# Altium PCB tinybord_1_1.PcbDoc
Units mm, origin at the board's own origin, x right, y up, seen from the top; angles counter-clockwise.
Board outline 35.56 x 45.72 mm, 2 copper layers (Top Layer, Bottom Layer), stack 0.533 mm thick; 59 components, 54 nets, 273 pads, 164 vias.
Unrouted connection lines stored in the file: 122.
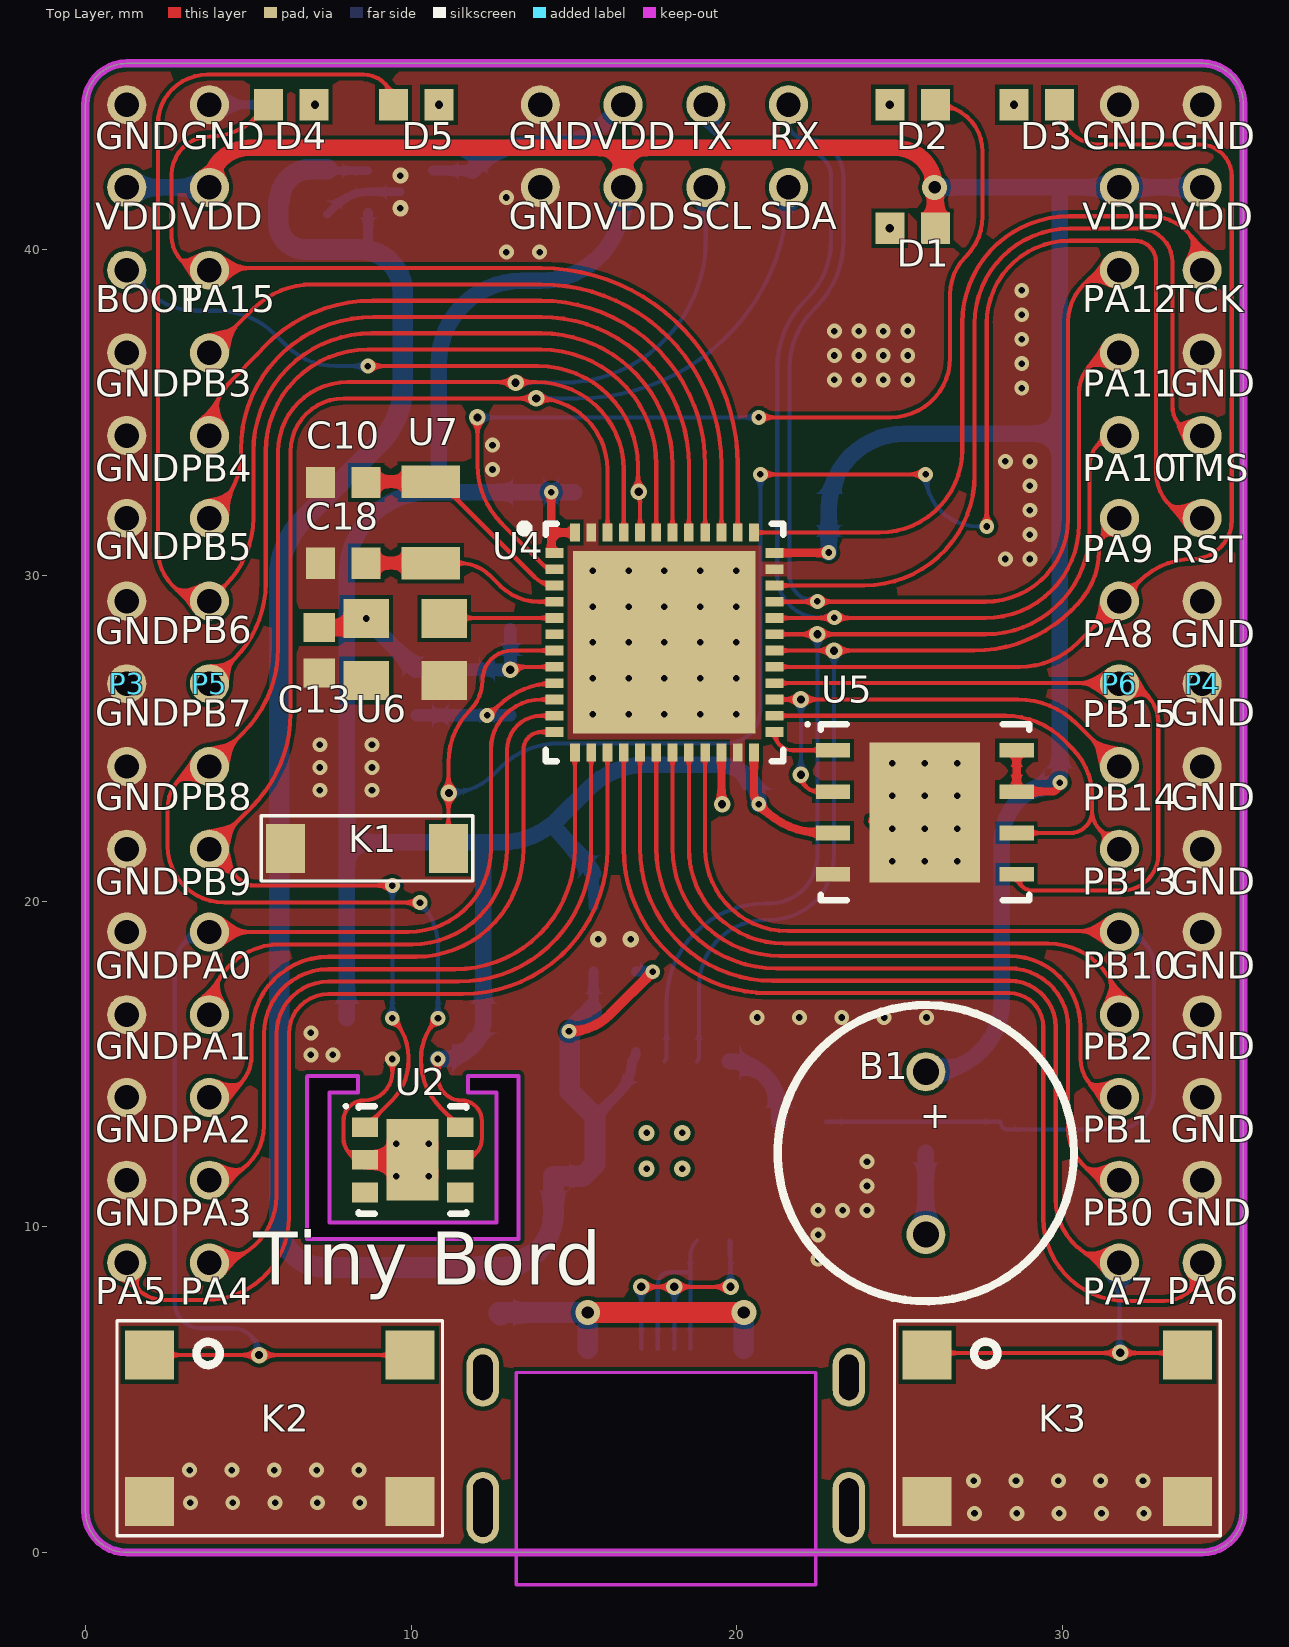
[diagram p0: Top Layer view]
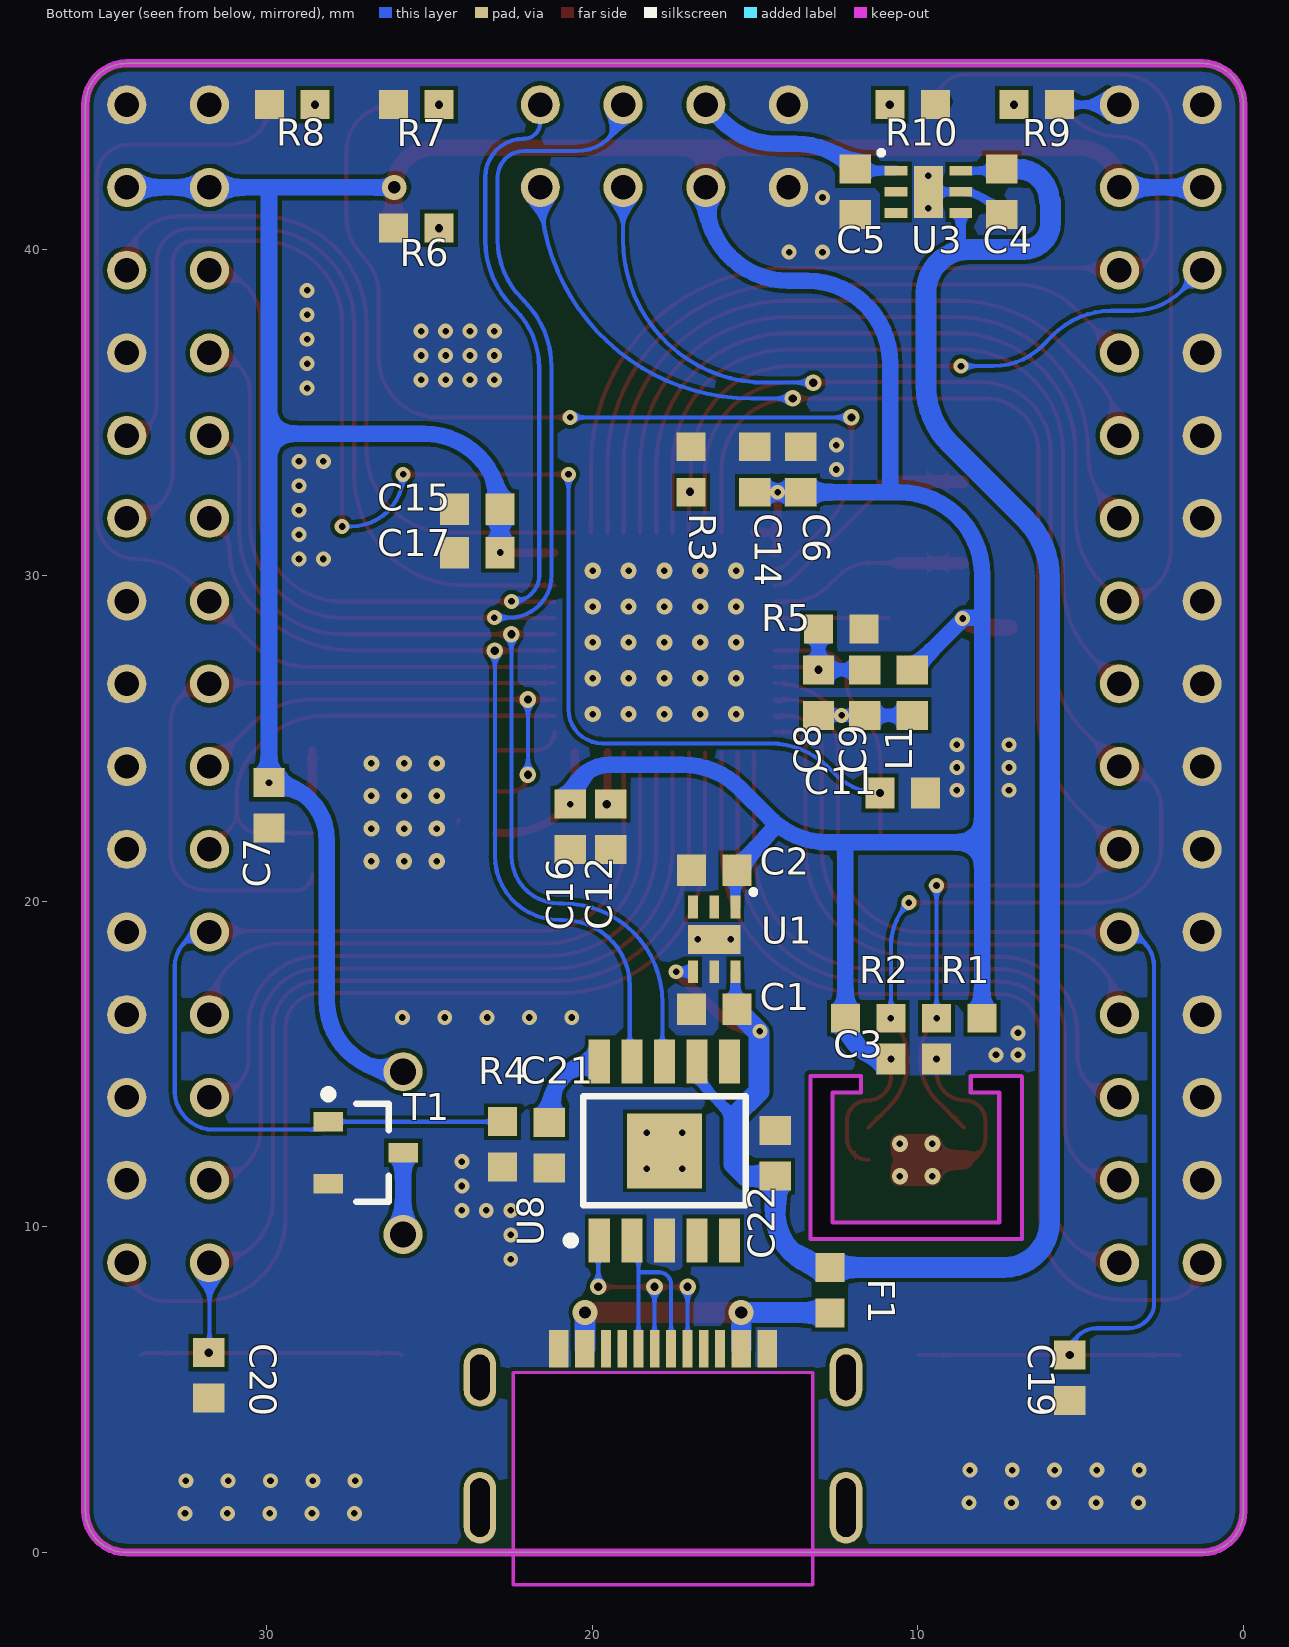
[diagram p1: Bottom Layer view, seen from below]
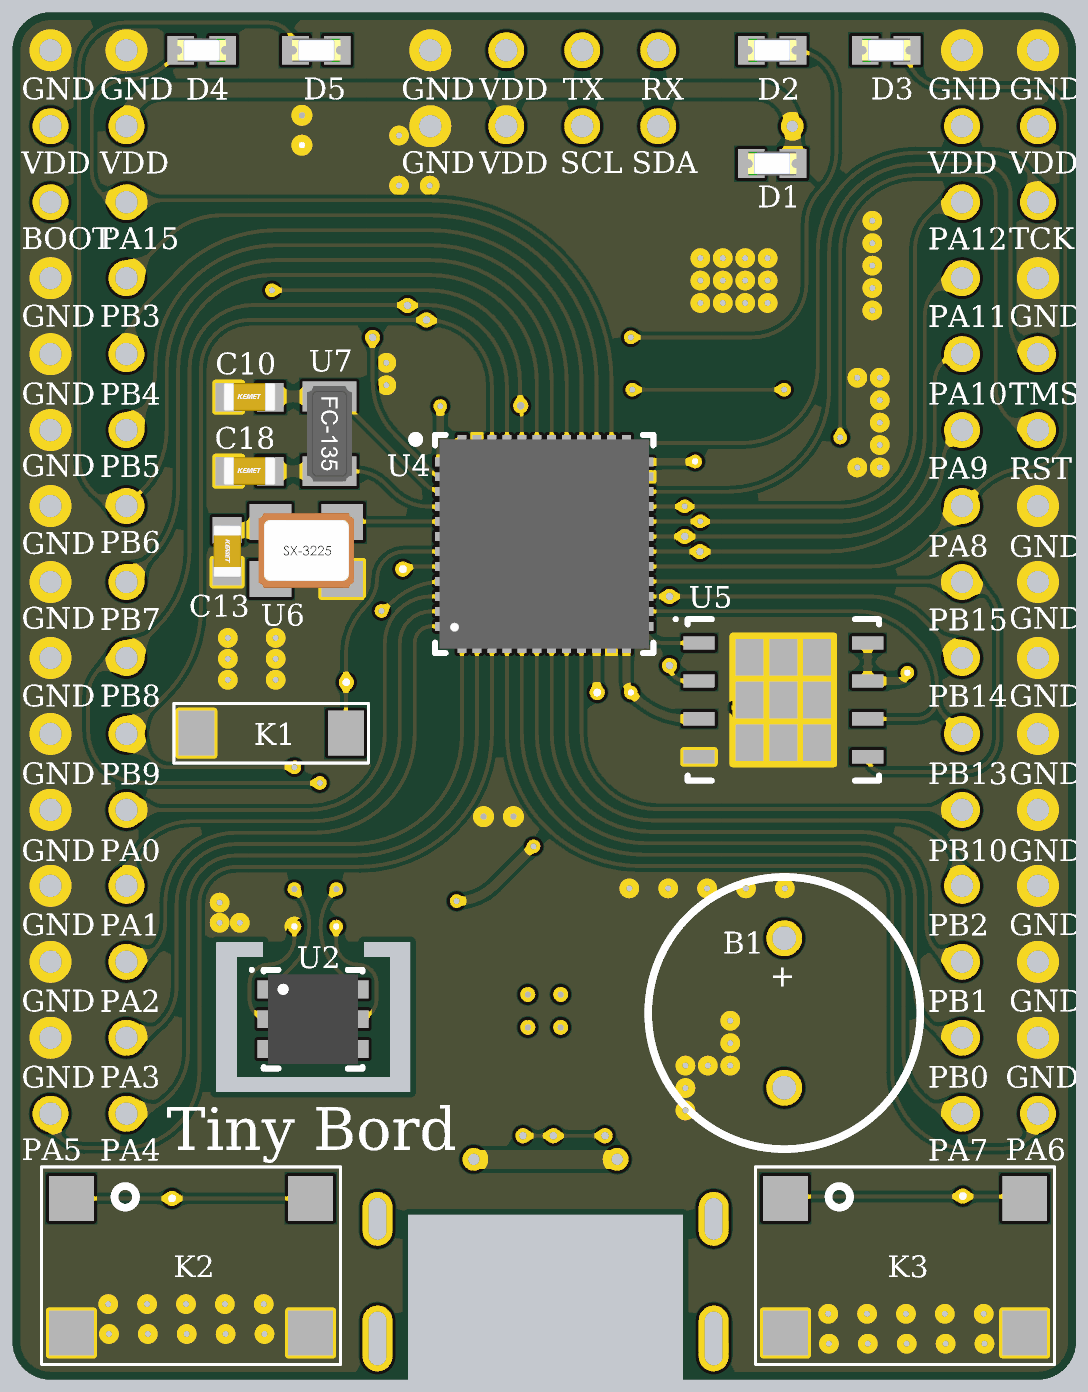
[diagram p2: 3D render of the assembled board from above, using the file's embedded part models]
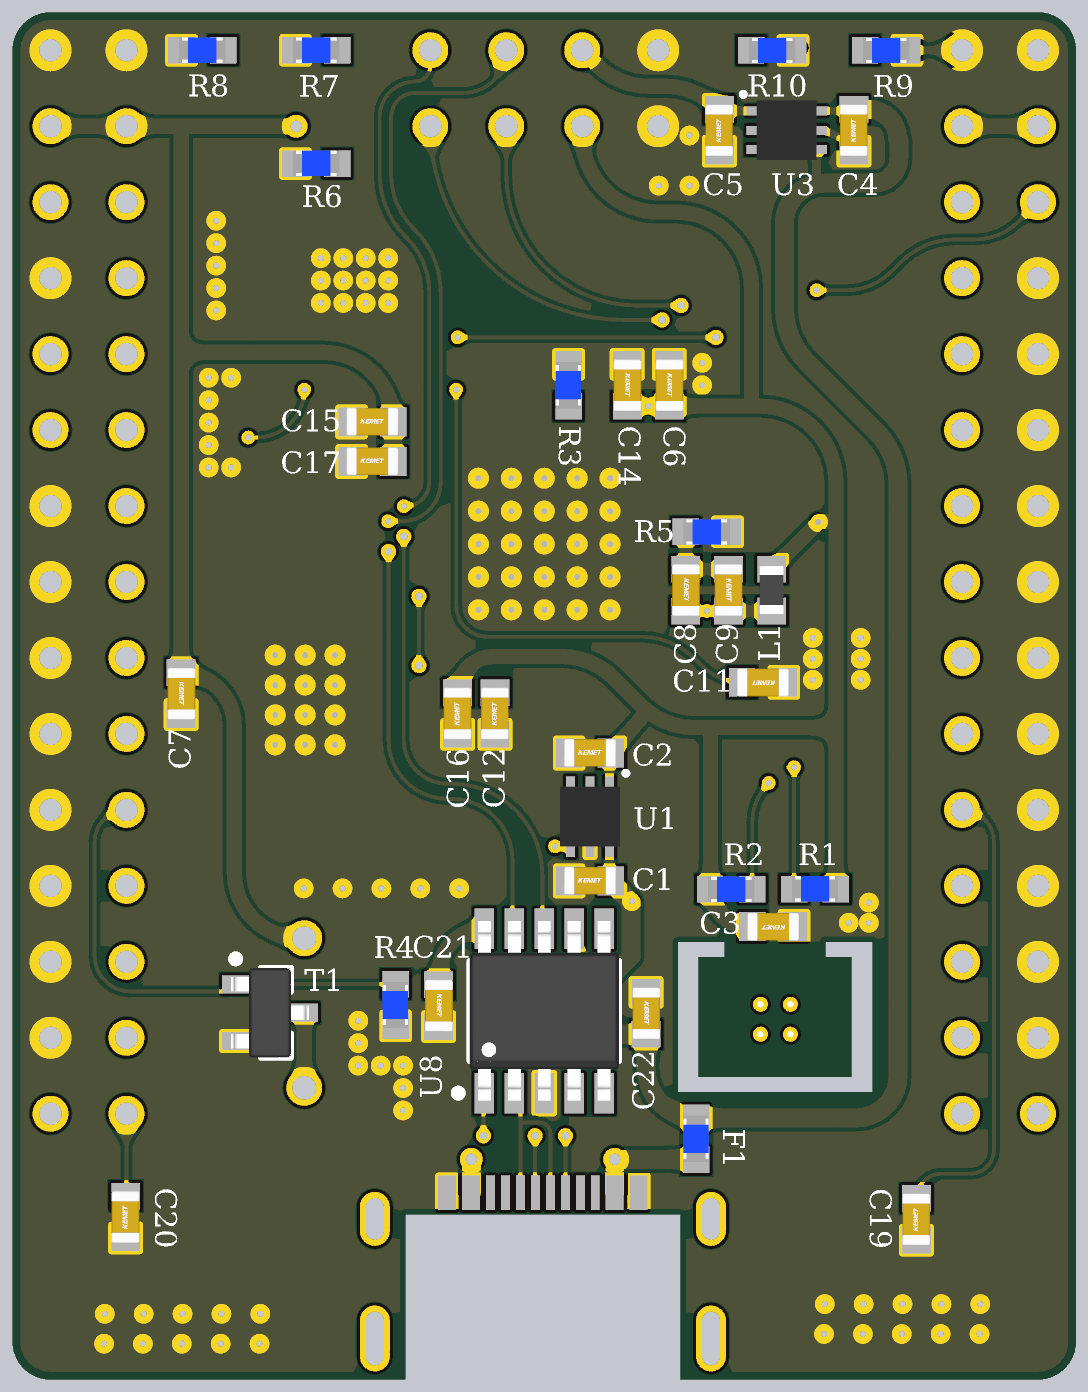
[diagram p3: 3D render of the assembled board from below, using the file's embedded part models]

## Layer stack, top to bottom
Top Solder: solder mask 0.0102, Solder Resist, Dk 3.5
Top Layer: signal copper 0.0356
Dielectric 2: prepreg 0.0711, PP-006, Dk 4.1
Dielectric 1: dielectric 0.32, FR-4, Dk 4.8
Dielectric 3: prepreg 0.0711, PP-006, Dk 4.1
Bottom Layer: signal copper 0.0356
Bottom Solder: solder mask 0.0102, Solder Resist, Dk 3.5

## Board outline
1.27,0 cw(c1.27,1.27) 0,1.27 0,44.45 cw(c1.27,44.45) 1.27,45.72 34.29,45.72 cw(c34.29,44.45) 35.56,44.45 35.56,1.27 cw(c34.29,1.27) 34.29,0
cut-out: 6.8,9.625 6.8,14.6 6.825,14.625 8.375,14.625 8.375,14.125 7.5,14.125 7.5,10.125 12.625,10.125 12.625,14.125 11.75,14.125 11.75,14.625 13.3,14.625 13.3,9.625

## Design rules (kind name [scope] priority, off if disabled: settings)
Clearance Clearance_2 [InNamedPolygon('GND_L01_P000')] p1: gap=0.127 ignorepadtopadclearanceinfootprint=FALSE except(0: Arc-Hole Track-Hole SMDPad-Hole THPad-Hole Via-Hole Fill-Hole Poly-Hole Region-Hole Text-Hole)
Clearance Clearance_1 [InNamedPolygon('Bottom Layer-GND')] p2: gap=0.127 ignorepadtopadclearanceinfootprint=FALSE except(0: Arc-Hole Track-Hole SMDPad-Hole THPad-Hole Via-Hole Fill-Hole Poly-Hole Region-Hole Text-Hole)
Clearance [All] p3: gap=0.127 ignorepadtopadclearanceinfootprint=TRUE except(0: Arc-Text Arc-Hole Track-Text Track-Hole SMDPad-Hole THPad-Hole Via-Hole Fill-Hole Poly-Hole Region-Hole Text-Text Text-Hole; 0.102: Arc-SMDPad Track-SMDPad)
HoleToHoleClearance [All] p1: gap=0.127 allowstackedmicrovias=TRUE
MinimumSolderMaskSliver [All] p1: minsoldermaskwidth=0
PlaneClearance [All] p1: clearance=0.3
PlaneConnect [All] p1: planeconnectstyle=Direct reliefexpansion=0.508 reliefentries=4 reliefconductorwidth=0.254 reliefairgap=0.254
PolygonConnect PolygonConnect_11 [All vs IsNamedPolygon('GND_L01_P000')] p1: connectstyle=Direct reliefconductorwidth=0.254 reliefentries=4 polygonreliefangle="90 Angle" airgapwidth=0.254
PolygonConnect PolygonConnect_10 [All vs IsNamedPolygon('Bottom Layer-GND')] p2: connectstyle=Direct reliefconductorwidth=0.254 reliefentries=4 polygonreliefangle="90 Angle" airgapwidth=0.254
PolygonConnect PolygonConnect_9 [All vs IsNamedPolygon('Bottom Layer-GND')] p3: connectstyle=Direct reliefconductorwidth=0.254 reliefentries=4 polygonreliefangle="90 Angle" airgapwidth=0.254
PolygonConnect PolygonConnect_8 [All vs IsNamedPolygon('GND_L01_P000')] p4: connectstyle=Direct reliefconductorwidth=0.254 reliefentries=4 polygonreliefangle="90 Angle" airgapwidth=0.254
PolygonConnect PolygonConnect_7 [All vs IsNamedPolygon('Bottom Layer-GND')] p5: connectstyle=Relief reliefconductorwidth=0.254 reliefentries=4 polygonreliefangle="90 Angle" airgapwidth=0.127
PolygonConnect PolygonConnect_6 [All vs IsNamedPolygon('GND_L01_P000')] p6: connectstyle=Relief reliefconductorwidth=0.127 reliefentries=4 polygonreliefangle="90 Angle" airgapwidth=0.127
PolygonConnect PolygonConnect_5 [All vs IsNamedPolygon('GND_L01_P000')] p7: connectstyle=Relief reliefconductorwidth=0.254 reliefentries=4 polygonreliefangle="90 Angle" airgapwidth=0.127
PolygonConnect PolygonConnect_4 [All vs IsNamedPolygon('Bottom Layer-GND')] p8: connectstyle=Relief reliefconductorwidth=0.254 reliefentries=4 polygonreliefangle="90 Angle" airgapwidth=0.127
PolygonConnect PolygonConnect_3 [All vs IsNamedPolygon('Bottom Layer-GND')] p9: thpad.connectstyle=Relief thpad.reliefconductorwidth=0.254 thpad.reliefentries=4 thpad.polygonreliefangle="90 Angle" thpad.airgapwidth=0.127 smdpad.connectstyle=Relief smdpad.reliefconductorwidth=0.254 smdpad.reliefentries=4 smdpad.polygonreliefangle="90 Angle" smdpad.airgapwidth=0.254 via.connectstyle=Relief via.reliefconductorwidth=0.254 via.reliefentries=4 via.polygonreliefangle="90 Angle" via.airgapwidth=0.254
PolygonConnect PolygonConnect_2 [All vs IsNamedPolygon('Bottom Layer-GND')] p10: thpad.connectstyle=Relief thpad.reliefconductorwidth=0.254 thpad.reliefentries=4 thpad.polygonreliefangle="90 Angle" thpad.airgapwidth=0.127 smdpad.connectstyle=Relief smdpad.reliefconductorwidth=0.254 smdpad.reliefentries=4 smdpad.polygonreliefangle="90 Angle" smdpad.airgapwidth=0.127 via.connectstyle=Relief via.reliefconductorwidth=0.254 via.reliefentries=4 via.polygonreliefangle="90 Angle" via.airgapwidth=0.254
PolygonConnect PolygonConnect_1 [All vs IsNamedPolygon('Bottom Layer-GND')] p11: thpad.connectstyle=Relief thpad.reliefconductorwidth=0.254 thpad.reliefentries=4 thpad.polygonreliefangle="90 Angle" thpad.airgapwidth=0.127 smdpad.connectstyle=Relief smdpad.reliefconductorwidth=0.254 smdpad.reliefentries=4 smdpad.polygonreliefangle="90 Angle" smdpad.airgapwidth=0.254 via.connectstyle=Relief via.reliefconductorwidth=0.254 via.reliefentries=4 via.polygonreliefangle="90 Angle" via.airgapwidth=0.254
PolygonConnect [All] p12: connectstyle=Relief reliefconductorwidth=0.254 reliefentries=4 polygonreliefangle="90 Angle" airgapwidth=0.254
RoutingVias [All] p1: holewidth=0.711 width=1.27 viastyle="Through Hole" minholewidth=0.203 minwidth=0.457 maxholewidth=0.711 maxwidth=1.27
ShortCircuit [All] p1: allowed=TRUE
SilkToSilkClearance [All] p1: silktosilkclearance=0
SilkToSolderMaskClearance [IsPad] p1: minsilkscreentomaskgap=0 clearancetoexposedcopper=TRUE
SolderMaskExpansion [All] p1: expansion=0.102
Width [All] p1: maxlimit=1.27 minlimit=0.127 preferedwidth=0.203 minimp=50.000000 maximp=50.000000 favimp=50.000000
23 further rules are at their usual default settings.

## Classes and differential pairs
component class tinybord: B1 C1 C2 C3 C4 C5 C6 C7 C8 C9 C10 C11 C12 C13 C14 C15 C16 C17 C18 C19 C20 C21 C22 D1 D2 D3 D4 D5 F1 K1 K2 K3 L1 R1 R2 R3 R4 R5 R6 R7 R8 R9 R10 T1 U1 U2 U3 U4 U5 U6 U7 U8

## Components (designator, comment, footprint, x,y, rotation, side; value= is the part's Value field where it differs from the comment)
B1 "BEEP" BEEP0905 25.806,12.257 r270 top
C1 "C0603" C0603 16.25,16.675 r180 bottom value=1uF/6.3v
C2 "C0603" C0603 16.25,20.95 r180 bottom value=1uF/6.3v
C3 "C0603" C0603 10.125,15.15 r0 bottom value=100nF
C4 "C0603" C0603 7.425,41.775 r90 bottom value=1uF/6.3v
C5 "C0603" C0603 11.925,41.775 r90 bottom value=1uF/6.3v
C6 "C0603" C0603 13.6,33.25 r270 bottom value=100nF
C7 "C0603" C0603 29.921,22.936 r270 bottom value=100nF
C8 "C0603" C0603 13.05,26.4 r270 bottom value=1uF
C9 "C0603" C0603 11.625,26.4 r270 bottom value=100nF
C10 "C0603" C0603 7.925,32.85 r0 top value=7pF
C11 "C0603" C0603 10.465,23.317 r0 bottom value=100nF
C12 "C0603" C0603 19.425,22.275 r90 bottom value=4.7uF
C13 "C0603" C0603 7.175,27.7 r270 top value=100nF
C14 "C0603" C0603 15.007,33.25 r270 bottom value=100nF
C15 "C0603" C0603 23.525,32.025 r180 bottom value=100nF
C16 "C0603" C0603 20.675,22.275 r90 bottom value=100nF
C17 "C0603" C0603 23.525,30.7 r180 bottom value=10uF
C18 "C0603" C0603 7.925,30.375 r0 top value=7pF
C19 "C0603" C0603 5.334,5.359 r90 bottom value=10nF
C20 "C0603" C0603 31.775,5.436 r90 bottom value=10nF
C21 "C0603" C0603 21.311,12.506 r270 bottom value=100nF
C22 "C0603" C0603 14.375,12.25 r270 bottom value=100nF
D1 "L0603" led0603 25.4,40.659 r0 top
D2 "L0603" led0603 25.4,44.45 r0 top
D3 "L0603" led0603 29.21,44.45 r0 top
D4 "L0603" led0603 6.325,44.45 r180 top
D5 "L0603" led0603 10.16,44.45 r180 top
F1 "FUSE" R0603 12.7,8.05 r90 bottom
K1 "key_3x4x2" "Key 3x4x2" 6.147,21.615 r0 top
K2 "key_6x6" "Key 6x6" 5.969,3.81 r0 top locked
K3 "key_6x6" "Key 6x6" 29.845,3.81 r0 top locked
L1 "B0603" B0603 10.175,26.4 r270 bottom value=330ohm
P1 "OLED" "4x1 header" 13.97,41.91 r0 top
P2 "wireless" "4x1 header" 13.97,44.45 r0 top
P3 "m15Pin" "15x1 header" 1.27,44.45 r270 top
P4 "m15Pin" "15x1 header" 34.29,44.45 r270 top
P5 "m15Pin" "15x1 header" 3.81,44.45 r270 top
P6 "m15Pin" "15x1 header" 31.75,44.45 r270 top
P7 "USB-Type-c" USB-TYPE-C 17.825,5.675 r180 bottom locked
R1 "R0603" R0603 8.725,16.4 r180 bottom value=10K
R2 "R0603" R0603 11.525,16.4 r0 bottom value=10K
R3 "R0603" R0603 16.967,33.25 r90 bottom value=10K
R4 "R0603" R0603 22.75,12.525 r90 bottom value=10K
R5 "R0603" R0603 12.35,28.35 r0 bottom value=0R
R6 "R0603" R0603 25.4,40.659 r180 bottom value=10K
R7 "R0603" R0603 25.4,44.45 r180 bottom value=1K
R8 "R0603" R0603 29.21,44.45 r180 bottom value=1K
R9 "R0603" R0603 6.35,44.45 r0 bottom value=1K
R10 "R0603" R0603 10.16,44.45 r0 bottom value=1K
T1 "NMOS" NMOS-BSH103 26.949,12.268 r180 bottom
U1 "LP5912" LP5912 16.25,18.825 r270 bottom
U2 "SHT21" SHT21 10.05,12.05 r0 top
U3 "LP5912" LP5912 9.675,41.775 r180 bottom
U4 "STM32F411CE" "STM32F411CE QFN" 17.78,27.94 r0 top
U5 "W25Q128JV_QFN" "W25Q64 QFN" 25.775,22.725 r0 top
U6 "SG-310SCF" SG-310SCF 9.825,27.725 r0 top
U7 "FC-135" FC-135 10.6,31.625 r90 top
U8 "CH9340K" CH9340 17.78,12.328 r90 bottom

## Footprints (in the part's own frame and the unit in brackets; to place one, negate y for a bottom-side part, rotate by r counter-clockwise, add the part's x,y. Pads: shape width x height; smd on the part's side, far side on the other; paste and mask are expansions set on the pad)
"4x1 header" [mm]
  round 1.2 hole 0.75: 1(0,0) 2(2.54,0) 3(5.08,0) 4(7.62,0)
"15x1 header" [mm]
  round 1.2 hole 0.75: 1(0,0) 2(2.54,0) 3(5.08,0) 4(7.62,0) 5(10.16,0) 6(12.7,0) 7(15.24,0) 8(17.78,0) 9(20.32,0) 10(22.86,0) 11(25.4,0) 12(27.94,0) 13(30.48,0) 14(33.02,0) 15(35.56,0)
B0603 [mil]
  rect 35x38 smd: 1(-27.5,0) 2(27.5,0)
  body extent -31,-16 31,16, height 31
BEEP0905 [mm]
  round 1.2 hole 0.8: 1(-2.5,0) 2(2.5,0)
  silkscreen extent -4.55,-4.55 4.55,4.55
C0603 [mil]
  rect 35x38 smd: 1(-27.5,0) 2(27.5,0)
  body extent -34,-18 34,19, height 33
CH9340 [mm]
  rect 1.35x0.65 smd: 1(-2.75,2) 2(-2.75,1) 3(-2.75,0) 4(-2.75,-1) 5(-2.75,-2) 6(2.75,-2) 7(2.75,-1) 8(2.75,0) 9(2.75,1) 10(2.75,2)
  rect 2.3x2.3 smd: 11(0,0)
  silkscreen extent -2.87,-2.5 1.68,3, body extent -3,-2.5 3,2.5, height 1.8
FC-135 [mm]
  rect 1x1.8 smd: 1(-1.25,0) 2(1.25,0)
  body extent -1.6,-0.75 1.6,0.75, height 0.8
"Key 3x4x2" [mm]
  rect 1.2x1.5 smd: 1(0,0) 2(5,0)
  silkscreen extent -0.75,-1 5.75,1
"Key 6x6" [mm]
  rect 1.5x1.5 smd: 1(-4,2.25) 2(4,2.25) 3(-4,-2.25) 4(4,-2.25)
  silkscreen extent -5,-3.3 5,3.3
led0603 [mil]
  rect 35x38 smd: 1(-27.5,0) 2(27.5,0)
  body extent -32,-16 32,16, height 24
LP5912 [mm] "SON, 6-Leads, Body 2.00x2.00mm, Pitch 0.65mm, Thermal Pad 1.60x0.89mm, IPC Medium Density"
  rect 0.7x0.3 smd: 1(-0.995,0.65) 2(-0.995,0) 3(-0.995,-0.65) 4(0.995,-0.65) 5(0.995,0) 6(0.995,0.65)
  rect 0.89x1.6 smd: 7(0,0)
  silkscreen extent -1.5,1.15 -1.4,1.25, body extent -1,-1 1,1, height 0.8
NMOS-BSH103 [mm] "SOT23, 3-Leads, Body 2.90x2.30mm, Pitch 0.95mm, IPC Medium Density"
  rect 0.9x0.6 smd: 1(-1.15,0.95) 2(-1.15,-0.95) 3(1.15,0)
  silkscreen extent -1.28,-1.5 0.7,1.92, body extent -1.3,-1.5 1.3,1.5, height 1.1
R0603 [mil]
  rect 35x35 smd: 1(-27.5,0) 2(27.5,0)
  body extent -31,-16 31,17, height 18
SG-310SCF [mm] "3225"
  rect 1.4x1.2 smd: 1(-1.2,-0.95) 2(1.2,-0.95) 3(1.2,0.95) 4(-1.2,0.95)
  body extent -1.6,-1.25 1.6,1.25, height 0.81
SHT21 [mm] "SON, 6-Leads, Body 3.00x3.00mm, Pitch 1.00mm, Thermal Pad 2.40x1.50mm, IPC Medium Density"
  rect 0.8x0.6 smd: 1(-1.46,1) 2(-1.46,0) 3(-1.46,-1) 4(1.46,-1) 5(1.46,0) 6(1.46,1)
  rect 1.6x2.5 smd paste-0.75: 7(0,0)
  silkscreen extent -2.1,-1.65 1.65,1.7, body extent -1.5,-1.5 1.5,1.5, height 1.1
"STM32F411CE QFN" [mm] "QFN, 48-Leads, Body 7.00x7.00mm, Pitch 0.50mm, Thermal Pad 5.60x5.60mm, IPC Medium Density"
  rect 0.55x0.3 smd: 1(-3.375,2.75) 2(-3.375,2.25) 3(-3.375,1.75) 4(-3.375,1.25) 5(-3.375,0.75) 6(-3.375,0.25) 7(-3.375,-0.25) 8(-3.375,-0.75) 9(-3.375,-1.25) 10(-3.375,-1.75) 11(-3.375,-2.25) 12(-3.375,-2.75) 25(3.375,-2.75) 26(3.375,-2.25) 27(3.375,-1.75) 28(3.375,-1.25) 29(3.375,-0.75) 30(3.375,-0.25) 31(3.375,0.25) 32(3.375,0.75) 33(3.375,1.25) 34(3.375,1.75) 35(3.375,2.25) 36(3.375,2.75)
  rect 0.3x0.55 smd: 13(-2.75,-3.375) 14(-2.25,-3.375) 15(-1.75,-3.375) 16(-1.25,-3.375) 17(-0.75,-3.375) 18(-0.25,-3.375) 19(0.25,-3.375) 20(0.75,-3.375) 21(1.25,-3.375) 22(1.75,-3.375) 23(2.25,-3.375) 24(2.75,-3.375) 37(2.75,3.375) 38(2.25,3.375) 39(1.75,3.375) 40(1.25,3.375) 41(0.75,3.375) 42(0.25,3.375) 43(-0.25,3.375) 44(-0.75,3.375) 45(-1.25,3.375) 46(-1.75,3.375) 47(-2.25,3.375) 48(-2.75,3.375)
  rect 5.6x5.6 smd: 49(0,0)
  silkscreen extent -4.42,-3.65 3.65,3.65, body extent -3.5,-3.5 3.5,3.5, height 0.55
USB-TYPE-C [mm]
  rect 0.6x1.15 smd: 1(-3.2,0.575) 2(-2.4,0.575) 11(2.4,0.575) 12(3.2,0.575)
  rect 0.3x1.15 smd: 3(-1.75,0.575) 4(-1.25,0.575) 5(-0.75,0.575) 6(-0.25,0.575) 7(0.25,0.575) 8(0.75,0.575) 9(1.25,0.575) 10(1.75,0.575)
  rrect100% 1x1.8 hole 1.4 slot 0.6 at 0 deg: 13(-5.62,-0.3) 15(5.62,-0.3)
  rrect100% 1x2.2 hole 1.8 slot 0.6 at 0 deg: 14(-5.62,-4.3) 16(5.62,-4.3)
  Keep-Out Layer board cut-out: -4.6,-6.665 -4.6,-0.152 4.6,-0.152 4.6,-6.665
  Keep-Out Layer lines w0.1: 4.597,-6.665 -4.597,-6.665 -4.597,-0.152 4.597,-0.152 4.597,-6.665
"W25Q64 QFN" [mm]
  rect 1.05x0.45 smd: 1(-2.82,1.905) 2(-2.82,0.635) 3(-2.82,-0.635) 4(-2.82,-1.905) 5(2.82,-1.905) 6(2.82,-0.635) 7(2.82,0.635) 8(2.82,1.905)
  rect 3.4x4.3 smd paste-1.7: 9(0,0)
  silkscreen extent -3.65,-2.7 3.2,2.75, body extent -3.05,-2.55 3.05,2.55, height 0.8

## Part data
B1: "12*6"
C1 C2 C3 C4 C5 C6 C7 C8 C9 C10 C11 C12 C13 C14 C15 C16 C17 C18 C19 C20 C21 C22: "陶瓷电容"
D1 D2 D3 D4 D5: "LED"
F1: library part PTC0603, "PTC 1812"
K1 K2 K3: "贴片按键"
L1: "磁珠"
P1 P2: library part m4Pin, "1x4pin 1.27mm"
P3 P4 P5 P6: "1x4pin 1.27mm"
P7: "use typec 16p"
R1 R2 R3 R4 R5 R6 R7 R8 R9 R10: "电阻"
T1: library part NMOS-BSH103, "infineon P-Chanel"
U1 U3: "LDO"
U2: "温湿度传感器"
U4: "STM32F411 QFN48PIN"
U5: "flash"
U6: "有源晶振3225"
U7: "32.768K无源晶振"
U8: "USB转串口"

## Via types
v1: diameter 0.457, hole 0.203, Top Layer to Bottom Layer, 91 vias
v2: diameter 0.5, hole 0.2, Top Layer to Bottom Layer, 49 vias
v3: diameter 0.508, hole 0.254, Top Layer to Bottom Layer, 21 vias
v4: diameter 0.762, hole 0.381, Top Layer to Bottom Layer, 3 vias

## Nets (pads, with @x,y where several pads share a name; then routed paths per layer and width w, separated by ;. In a path a pad name is that pad's centre, name@x,y a point inside that pad or via, vN(x,y) a via of type N, cw(c..) or ccw(c..) an arc to the next point about the centre after c; other vN are vias at no path point)
BOOT: P3.3 R3.1 U4.44 | length 20.6
  Top Layer w0.127: v1(8.675,36.425) 13.901,36.425 cw(c13.901,33.358) 16.968,33.358 16.968,32.587 ccw(c16.993,32.587) v3(16.993,32.563) 16.911,32.563 16.9,32.551 cw(c16.586,32.238) 17.03,32.238 U4.44
  Bottom Layer w0.127: P3.3 1.908,38.732 ccw(c3.375,40.201) 3.375,38.125 4.048,38.125 cw(c4.048,35.585) 5.844,37.381 6.175,37.05 ccw(c7.684,38.559) 7.684,36.425 v1(8.675,36.425)
GND: C1.1 C2.1 C3.1 C4.1 C5.1 C6.1 C7.2 C10.1 C11.1 C12.1 C13.2 C14.1 C15.1 C16.1 C17.1 C18.1 C19.1 C20.1 C21.2 C22.1 K1.1 K2.3 K2.4 K3.3 K3.4 P1.1 P2.1 P3.1 P3.4 P3.5 P3.6 P3.7 P3.8 P3.9 P3.10 P3.11 P3.12 P3.13 P3.14 P4.1 P4.4 P4.7 P4.8 P4.9 P4.10 P4.11 P4.12 P4.13 P4.14 P5.1 P6.1 P7.1 P7.12 R3.2 R4.1 R5.1 R6.1 R7.1 R8.1 R9.1 R10.1 T1.2 U1.5 U1.7 U2.2 U2.7 U3.5 U3.7 U4.23 U4.35 U4.47 U4.49 U5.4 U5.9 U6.2 U8.3 | length 16.1
  Top Layer w0.127: U2.2 cw(c8.59,12.715) 7.925,12.715 7.925,13.25 cw(c8.55,13.25) 8.55,13.875 ccw(c8.55,14.751) 9.427,14.751 v1(9.427,15.15)
  Top Layer w0.6: U2.2 U2.7 cw(c10.05,11.55) U2.7@10.35,11.95 ; U2.7@10.35,11.95 ccw(c9.55,12.55) U2.7@10.416,12.05 ; U2.7@10.35,11.95 cw(c9.55,12.55) v2(9.55,11.55) v2(10.55,11.55) ; U2.7@10.35,11.95 cw(c10.05,11.55) v2(10.55,11.55) ; U2.7@10.416,12.05 ccw(c9.55,12.55) v2(10.55,12.55) v2(9.55,12.55) cw(c9.55,11.55) U2.7@10.416,12.05 ; U2.7@10.416,12.05 cw(c9.55,11.55) v2(10.55,11.55)
  Bottom Layer w0.254: P5.1 R9.1 ; C4.1 7.73,41.381 cw(c8.68,40.431) U3.5 U3.7 ; R10.1@9.19,44.552 cw(c9.19,44.527) R10.1@9.215,44.527
  other v1: 27.3,1.2 28.6,1.2 29.9,1.2 31.2,1.2 32.5,1.2 3.225,1.525 4.525,1.525 5.825,1.525 7.125,1.525 8.425,1.525 27.275,2.2 28.575,2.2 29.875,2.2 31.175,2.2 32.475,2.2 3.2,2.525 4.5,2.525 5.8,2.525 7.1,2.525 8.4,2.525 22.5,9 22.5,9.75 22.5,10.5 23.25,10.5 24,10.5 24,11.25 24,12 6.925,15.275 7.6,15.275 6.925,15.95 20.625,16.425 21.925,16.425 23.225,16.425 24.525,16.425 25.825,16.425 7.2,23.4 8.8,23.4 7.2,24.1 8.8,24.1 7.2,24.8 8.8,24.8 28.25,30.5 29,30.5 29,31.25 29,32 29,32.75 12.5,33.25 28.25,33.5 29,33.5 12.5,34 28.75,35.75 23,36 23.75,36 24.5,36 25.25,36 28.75,36.5 23,36.75 23.75,36.75 24.5,36.75 25.25,36.75 28.75,37.25 23,37.5 23.75,37.5 24.5,37.5 25.25,37.5 28.75,38 28.75,38.75 12.925,39.925 13.95,39.925 12.925,41.6
  other v2: 15.75,18.825 16.75,18.825 24.775,21.225 25.775,21.225 26.775,21.225 24.775,22.225 25.775,22.225 26.775,22.225 24.775,23.225 25.775,23.225 26.775,23.225 24.775,24.225 25.775,24.225 26.775,24.225 15.58,25.74 16.68,25.74 17.78,25.74 18.88,25.74 19.98,25.74 15.58,26.84 16.68,26.84 17.78,26.84 18.88,26.84 19.98,26.84 15.58,27.94 16.68,27.94 17.78,27.94 18.88,27.94 19.98,27.94 15.58,29.04 16.68,29.04 17.78,29.04 18.88,29.04 19.98,29.04 15.58,30.14 16.68,30.14 17.78,30.14 18.88,30.14 19.98,30.14 9.675,41.275 9.675,42.275
NetB1_2: B1.2 T1.3 | length 2.5
  Bottom Layer w0.508: T1.3 25.806,12.268 B1.2
NetC8_1: C8.1 C9.1 R5.2 U4.8 | length 4.1
  Top Layer w0.127: v3(13.05,27.099) cw(c13.141,27.099) 13.141,27.19 U4.8
  Bottom Layer w0.381: C9.1 v3(13.05,27.099) ; R5.2 v3(13.05,27.099) ; v3(13.05,27.099) v3(13.05,27.099)
NetC8_2: C8.2 C9.2 L1.2 U4.9 | length 5.2
  Top Layer w0.127: v1@12.395,25.702 12.661,25.968 cw(c14.405,24.223) U4.9
  Bottom Layer w0.381: L1.2 C9.2 v1(12.337,25.702) C8.2
NetC12_2: C12.2 U4.22 | length 1.6
  Top Layer w0.254: U4.22 19.53,23.023 ccw(c19.598,23.023) v3(19.55,22.975)
NetC21_1: C21.1 U8.10 | length 2.7
  Bottom Layer w0.508: U8.10 cw(c19.78,13.548) 21.311,13.548 C21.1
NetD1_1: D1.1 R6.2
  other v3: 24.701,40.659
NetD2_1: D2.1 R7.2
  other v3: 24.701,44.45
NetD3_1: D3.1 R8.2
  other v3: 28.511,44.45
NetD4_1: D4.1 R9.2
  other v3: 7.048,44.45
NetD5_1: D5.1 R10.2
  other v3: 10.858,44.45
NRST: C11.2 K1.2 P4.6 U4.7 | length 56.2
  Top Layer w0.127: K1.2@11.426,21.895 ccw(c11.426,21.615) K1.2 11.147,24.254 cw(c13.415,24.254) 11.811,25.857 ccw(c10.891,26.777) 12.192,26.777 cw(c13.105,26.777) 13.105,27.69 U4.7 ; v1(20.726,33.101) v1(25.801,33.101) ; v1@27.675,31.501 27.675,37.735 cw(c30.215,37.735) 30.215,40.275 32.225,40.275 cw(c32.225,39.625) 32.875,39.625 32.875,33.165 ccw(c34.29,33.165) P4.6
  Bottom Layer w0.127: v3(11.163,23.317) ccw(c11.163,25.249) 12.529,23.883 12.743,24.097 cw(c14.54,22.301) 14.54,24.841 19.687,24.841 ccw(c19.687,25.879) 20.725,25.879 v1(20.726,33.101) ; v1(25.801,33.101) ccw(c27.401,33.101) 27.401,31.501 v1(27.676,31.501)
OSC32_IN: C10.2 U4.3 U7.2 | length 7.7
  Top Layer w0.127: U7.2@11.225,32.875 U7.2 cw(c10.6,32.238) 11.05,32.688 13.797,29.941 ccw(c14.405,30.55) U4.3
  Top Layer w0.381: C10.2 cw(c8.648,32.85) 8.648,32.875 U7.2
OSC32_OUT: C18.2 U4.4 U7.1 | length 6.1
  Top Layer w0.127: U7.1 11.488,30.375 cw(c11.488,29.036) 12.435,29.983 12.736,29.682 ccw(c13.924,30.87) 13.924,29.19 U4.4
  Top Layer w0.381: C18.2 U7.1
OSC_IN: U4.5 U6.3 | length 3.5
  Top Layer w0.127: U6.3@10.9,28.675 10.9,28.69 U4.5@14.43,28.69
PA0: C19.2 K2.1 K2.2 P5.11 U4.10 | length 39.7
  Top Layer w0.127: K2.1 v3(5.334,6.058) v3(5.334,6.058) K2.2 K2.2 ; P5.11 9.91,19.05 ccw(c9.91,21.59) 12.45,21.59 12.45,24.64 cw(c14,24.64) 14,26.19 U4.10 cw(c14.252,26.343) 14.252,26.126 U4.10@14.214,26.126
  Bottom Layer w0.127: P5.11 ccw(c3.81,17.983) 2.743,17.983 2.743,7.671 ccw(c3.531,7.671) 3.531,6.883 4.508,6.883 cw(c4.508,6.058) v3(5.334,6.058)
PA1: P5.12 U4.11 | length 17.3
  Top Layer w0.127: P5.12 cw(c5.969,16.51) 5.969,18.669 10.029,18.669 ccw(c10.029,21.59) 12.95,21.59 12.95,24.64 cw(c14,24.64) 14,25.69 U4.11 cw(c14.252,25.843) U4.11@14.252,25.626
PA4: P5.15 U4.14 | length 24.1
  Top Layer w0.127: P5.15 ccw(c3.81,10.947) 5.867,10.947 5.867,15.926 cw(c7.468,15.926) 7.468,17.526 11.466,17.526 ccw(c11.466,21.59) 15.53,21.59 U4.14
PA5: P3.15 U4.15 | length 28.7
  Top Layer w0.127: P3.15 ccw(c2.413,8.89) 2.413,7.747 3.708,7.747 ccw(c3.708,10.287) 6.248,10.287 6.248,15.926 cw(c7.468,15.926) 7.468,17.145 11.585,17.145 ccw(c11.585,21.59) 16.03,21.59 U4.15
PA6: P4.15 U4.16 | length 31.8
  Top Layer w0.127: U4.16 16.53,21.615 ccw(c20.975,21.615) 20.975,17.17 28.372,17.17 cw(c28.372,16.129) 29.413,16.129 29.413,10.262 ccw(c31.953,10.262) 31.953,7.722 33.122,7.722 ccw(c33.122,8.89) P4.15
PA7: C20.2 K3.1 K3.2 P6.15 U4.17 | length 38
  Top Layer w0.127: U4.17 17.03,21.615 ccw(c21.094,21.615) 21.094,17.551 28.372,17.551 cw(c28.372,16.129) 29.794,16.129 29.794,10.846 ccw(c31.75,10.846) P6.15 ; K3.1 cw(c25.993,5.912) 25.993,6.121 33.697,6.121 cw(c33.697,5.912) K3.2
  Bottom Layer w0.127: P6.15 31.75,6.185 ccw(c31.801,6.185) C20.2@31.801,6.134
  other v3: 31.775,6.134
PA8: D3.2 P6.7 U4.29 | length 33
  Top Layer w0.127: U4.29 28.678,27.19 ccw(c28.678,29.73) 30.474,27.934 P6.7 32.361,29.821 cw(c34,28.182) 34,30.5 ccw(c34,31.7) 35.2,31.7 35.2,42.25 ccw(c34.225,42.25) 34.225,43.225 31.133,43.225 cw(c31.133,44.45) D3.2
PA9: P6.6 U4.30 U8.9 | length 27.8
  Top Layer w0.127: U4.30 27.287,27.69 ccw(c27.287,31.913) 30.273,28.927 30.438,29.092 ccw(c28.78,30.75) 31.125,30.75 cw(c32.03,30.75) 31.39,31.39 P6.6
  Bottom Layer w0.127: U8.9 ccw(c18.627,15.232) 18.844,15.232 18.844,17.385 cw(c20.875,17.385) 20.875,19.417 21.01,19.417 ccw(c21.01,21.394) 22.987,21.394 v3(22.987,27.686)
PA10: P6.5 U4.31 U8.8 | length 30.8
  Top Layer w0.127: U4.31 27.635,28.19 ccw(c27.635,31.39) 30.836,31.39 30.836,33.376 cw(c31.75,33.376) P6.5
  Bottom Layer w0.127: U8.8 ccw(c17.627,15.232) 17.843,15.232 17.843,16.893 cw(c20.875,16.893) 20.875,19.925 21.01,19.925 ccw(c21.01,21.394) 22.479,21.394 v3(22.479,28.194)
PA11: P2.3 P6.4 U4.32 | length 37.3
  Top Layer w0.127: U4.32 27.635,28.69 ccw(c27.635,31.56) 30.505,31.56 30.505,35.585 cw(c31.75,35.585) P6.4
  Bottom Layer w0.127: P2.3 ccw(c20.475,44.45) 20.475,43.025 22.1,43.025 cw(c22.1,42.225) 22.9,42.225 22.9,40.291 cw(c20.36,40.291) 22.156,38.495 22.1,38.438 ccw(c24.165,36.373) 21.244,36.373 21.244,30 ccw(c22.544,30) 22.544,28.7 v1(23,28.7)
PA12: P2.4 P6.3 U4.33 | length 36.2
  Top Layer w0.127: U4.33 27.635,29.19 ccw(c27.635,31.73) 30.175,31.73 30.175,37.795 cw(c31.75,37.795) P6.3
  Bottom Layer w0.127: P2.4 21.59,43.916 ccw(c22.1,43.916) 22.1,43.406 cw(c22.1,42.225) 23.281,42.225 23.281,40.291 cw(c20.36,40.291) 22.425,38.225 22.369,38.169 ccw(c24.165,36.373) 21.625,36.373 21.625,30 ccw(c22.425,30) 22.425,29.2 v1(22.475,29.2)
PA15: D4.2 P5.3 U4.38 | length 29.4
  Top Layer w0.127: D4.2 5.235,44.059 cw(c3.825,45.469) 3.825,43.475 ccw(c3.825,42.3) 2.65,42.3 2.65,40.4 ccw(c3.68,40.4) 3.68,39.37 P5.3 cw(c3.873,39.37) 3.873,39.433 13.99,39.433 cw(c13.99,33.393) 20.03,33.393 U4.38 ; D4.2@5.651,44.45 D4.2@5.664,44.45
PB0: P6.14 U4.18 | length 24.3
  Top Layer w0.127: U4.18 17.53,21.615 ccw(c21.213,21.615) 21.213,17.932 28.372,17.932 cw(c28.372,16.129) 30.175,16.129 30.175,13.005 ccw(c31.75,13.005) P6.14
PB1: P6.13 U4.19 | length 21.4
  Top Layer w0.127: U4.19 18.03,21.615 ccw(c21.332,21.615) 21.332,18.313 28.372,18.313 cw(c28.372,16.129) 30.556,16.129 30.556,15.164 ccw(c31.75,15.164) P6.13
PB2: P6.12 U4.20 | length 18.9
  Top Layer w0.127: U4.20 18.53,21.615 ccw(c21.451,21.615) 21.451,18.694 29.566,18.694 cw(c29.566,16.51) P6.12@31.735,16.764 ; P6.12@31.725,16.51 P6.12
PB3: P5.4 U4.39 | length 21.7
  Top Layer w0.127: P5.4 5.169,38.189 cw(c6.965,36.393) 6.965,38.933 13.99,38.933 cw(c13.99,33.393) 19.53,33.393 U4.39
PB4: P5.5 U4.40 | length 22.2
  Top Layer w0.127: P5.5 cw(c6.277,34.29) 4.532,36.034 5.288,36.79 cw(c8.812,33.833) 8.812,38.433 13.99,38.433 cw(c13.99,33.393) 19.03,33.393 U4.40
PB5: P5.6 U4.41 | length 23.2
  Top Layer w0.127: P5.6 4.032,31.972 ccw(c2.236,33.768) 4.776,33.768 4.776,33.869 cw(c8.84,33.869) 8.84,37.933 13.99,37.933 cw(c13.99,33.393) 18.53,33.393 U4.41
PB6: D5.2 P5.7 U4.42 | length 48.5
  Top Layer w0.127: D5.2 ccw(c8.537,44.45) 8.537,45.375 3.75,45.375 ccw(c3.75,43.85) 2.225,43.85 2.225,30.795 ccw(c3.81,30.795) P5.7 4.301,29.701 ccw(c2.236,31.767) 5.157,31.767 5.157,33.8 cw(c8.79,33.8) 8.79,37.433 13.99,37.433 cw(c13.99,33.393) 18.03,33.393 U4.42
PB7: P5.8 U4.43 | length 25.6
  Top Layer w0.127: P5.8 4.571,27.431 ccw(c2.236,29.766) 5.538,29.766 5.538,33.8 cw(c8.671,33.8) 8.671,36.933 13.843,36.933 13.99,36.933 cw(c13.99,33.393) 17.53,33.393 U4.43
PB8: P1.3 P5.9 R2.1 U2.6 U4.45 | length 55.2
  Top Layer w0.127: v1(10.275,19.95) 4.275,19.95 cw(c4.275,21.7) 2.525,21.7 2.525,22.845 cw(c3.81,22.845) P5.9 4.84,25.16 ccw(c2.236,27.765) 5.919,27.765 5.919,33.8 cw(c8.052,33.8) 8.052,35.933 13.846,35.933 cw(c13.846,33.249) 16.53,33.249 U4.45 ; v1(10.827,16.4) ccw(c12.098,15.129) 10.3,15.129 10.3,15.125 ccw(c12.388,15.125) 10.912,13.648 U2.6
  Bottom Layer w0.127: v1(10.827,16.4) 10.827,18.619 ccw(c8.944,18.619) v1@10.283,19.942 ; v3(13.208,35.916) 14.662,35.916 ccw(c14.662,40.304) 19.05,40.304 P1.3 ; v1@10.283,19.942 ccw(c8.944,18.619) v1(10.275,19.95) v1@10.283,19.942
PB9: P1.4 P5.10 R1.1 U2.1 U4.46 | length 52.6
  Top Layer w0.127: U2.1 9.402,13.862 ccw(c8.138,15.125) 9.925,15.125 9.925,15.189 ccw(c8.213,15.189) v1(9.424,16.4) ; v1(9.425,20.475) 5.175,20.475 cw(c5.175,21.079) 4.748,20.652 P5.10 5.11,22.89 ccw(c2.236,25.763) 6.3,25.763 6.3,33.8 cw(c7.933,33.8) 7.933,35.433 v3(13.843,35.433) 13.846,35.433 cw(c13.846,33.249) 16.03,33.249 U4.46
  Bottom Layer w0.127: v1(9.424,16.4) 9.425,16.401 v1(9.425,20.475) 9.622,20.475 v1@9.624,20.474 ; v3(13.843,35.433) 15.113,35.433 ccw(c15.113,41.91) P1.4
PB10: P6.11 R4.2 T1.1 U4.21 | length 33.5
  Top Layer w0.127: U4.21 19.03,21.615 ccw(c21.57,21.615) 21.57,19.075 31.725,19.075 cw(c31.725,19.05) P6.11
  Bottom Layer w0.127: R4.2 28.094,13.223 T1.1 ccw(c28.338,13.218) 28.338,12.979 31.623,12.979 ccw(c31.623,14.173) 32.817,14.173 32.817,17.983 ccw(c31.75,17.983) P6.11
PB13: P6.10 U4.26 U5.6 | length 15.7
  Top Layer w0.127: U4.26 28.249,25.69 cw(c28.249,23.15) 30.045,24.946 30.302,24.689 cw(c28.83,23.217) 30.912,23.217 30.912,22.758 ; U5.6 30.243,22.09 ccw(c30.243,22.758) 30.912,22.758 ; P6.10 31.146,22.194 cw(c31.709,22.758) 30.912,22.758
PB14: P6.9 U4.27 U5.2 | length 14.9
  Top Layer w0.127: U4.27 28.638,26.19 cw(c28.638,23.65) 30.434,25.446 P6.9 ; v3(21.971,23.876) ccw(c22.487,23.876) 22.487,23.36 U5.2
  Bottom Layer w0.127: v3(21.971,23.876) v3(21.971,26.187)
PB15: P6.8 U4.28 U5.5 | length 21.8
  Top Layer w0.127: U4.28 31.702,26.69 cw(c31.702,26.622) P6.8 cw(c31.75,25.476) 32.944,25.476 32.944,21.438 cw(c31.826,21.438) 31.826,20.32 29.095,20.32 cw(c29.095,20.82) U5.5
PC13: D2.2 U4.2 | length 30.1
  Top Layer w0.127: v3(12.04,34.849) 12.04,33.391 ccw(c14.58,33.391) 12.784,31.595 14.074,30.305 ccw(c14.35,30.581) 14.35,30.19 U4.2 ; v1(20.675,34.85) 24.725,34.85 ccw(c24.725,36.675) 26.55,36.675 26.55,38.628 cw(c28.172,38.628) 27.025,39.775 27.037,39.787 ccw(c25.8,41.025) 27.55,41.025 27.55,42.998 ccw(c26.098,42.998) D2.2
  Bottom Layer w0.127: v3(12.04,34.849) v1(20.675,34.85) v1(20.675,34.85)
SPI2_FLASH_CS: U4.25 U5.1 | length 2.1
  Top Layer w0.127: U4.25 ccw(c21.715,25.19) 21.715,24.63 U5.1
TCK: P4.3 U4.37 | length 21.9
  Top Layer w0.127: U4.37 24.385,31.315 ccw(c24.385,33.855) 26.925,33.855 26.925,37.747 cw(c30.203,37.747) 30.203,41.025 32.7,41.025 cw(c32.7,39.435) 34.29,39.435 P4.3
TMS: P4.5 U4.34 | length 26.9
  Top Layer w0.127: U4.34 23.915,29.69 ccw(c23.915,33.081) 27.306,33.081 27.306,37.735 cw(c30.215,37.735) 30.215,40.644 32.356,40.644 cw(c32.356,39.625) 33.375,39.625 33.375,35.205 ccw(c34.29,35.205) P4.5
UD+: P7.6 P7.8 U8.1 | length 9.1
  Top Layer w0.127: v3(17.069,8.153) v3(18.085,8.153) v3(19.812,8.153) 19.812,8.262 v3@19.825,8.275
  Bottom Layer w0.127: v3(17.069,8.153) 17.069,6.269 17.075,6.262 17.069,6.256 P7.8 ; P7.6 18.085,6.26 18.075,6.27 18.085,6.279 v3(18.085,8.153) ; U8.1@19.775,9.353 U8.1@19.775,9.475 ; U8.1@19.78,9.111 U8.1 cw(c19.671,9.47) 19.825,9.47 19.812,9.457 v3(19.812,8.153) ; U8.1@19.807,9.008 U8.1@19.807,9.353
UD-: P7.5 P7.7 U8.2 | length 6.6
  Bottom Layer w0.127: P7.7 17.575,8.228 cw(c17.947,8.228) 17.947,8.6 18.525,8.6 cw(c18.525,8.55) 18.575,8.55 ; P7.5 18.575,8.55 ; U8.2 ccw(c19.275,9.083) 18.575,9.083 18.575,8.6 18.575,8.55
USART2_RX: P5.14 U4.13 | length 21.2
  Top Layer w0.127: P5.14 ccw(c3.81,13.106) 5.486,13.106 5.486,15.926 cw(c7.468,15.926) 7.468,17.907 11.347,17.907 ccw(c11.347,21.59) 15.03,21.59 U4.13
USART2_TX: P5.13 U4.12 | length 18.6
  Top Layer w0.127: P5.13 ccw(c3.81,15.265) 5.105,15.265 5.105,15.926 cw(c7.468,15.926) 7.468,18.288 10.148,18.288 ccw(c10.148,21.59) 13.45,21.59 13.45,24.64 cw(c14,24.64) 14,25.19 U4.12
V3.3V: C5.2 P2.2 U3.1 | length 6.5
  Bottom Layer w0.305: U3.1 C5.2@11.877,42.425
  Bottom Layer w0.508: C5.2@11.877,42.425 C5.2 11.958,42.506 cw(c13.754,40.71) 13.754,43.25 14.325,43.25 ccw(c14.325,45.628) 16.006,43.946 P2.2
VCC: C1.2 C4.2 C22.2 F1.2 U1.4 U1.6 U3.4 U3.6 U8.7 | length 65.7
  Top Layer w0.305: v1(14.85,16) ccw(c14.85,17.787) 16.113,16.523 v1(17.42,17.83)
  Bottom Layer w0.254: C4.2 ccw(c7.473,42.473) 7.473,42.425 U3.6
  Bottom Layer w0.305: 8.42,40.005 ccw(c8.42,40.265) 8.68,40.265 U3.4 ; C1.2 ccw(c15.434,16.792) 15.6,16.792 U1.6 ; 15.65,13.375 16.375,14.1 ccw(c15.396,15.078) U8.7 ccw(c16.49,15.368) U8.7@16.9,15.368 ; U1.4 v1(17.42,17.83)
  Bottom Layer w0.635: C4.2 6.933,42.473 ccw(c6.933,41.504) 5.964,41.504 ccw(c5.964,41.465) 5.925,41.465 5.925,40.825 ccw(c6.745,40.825) 6.745,40.005 8.42,40.005 cw(c8.42,38.675) 9.75,38.675 9.75,35.827 cw(c7.21,35.827) 9.006,34.031 6.694,31.719 ccw(c8.49,29.923) 5.95,29.923 5.95,10.15 ccw(c7.352,10.15) 7.352,8.748 F1.2 ccw(c12.7,10.423) 14.375,10.423 C22.2 14.377,11.55 15.278,11.55 15.65,11.922 15.65,13.375 14.875,14.15 14.875,15.96 15.552,16.637 C1.2
VCC_E: F1.1 P7.2 P7.11 | length 9.5
  Top Layer w0.4: v4@15.265,7.315 v4@15.31,7.271
  Top Layer w0.635: v4(15.425,7.366) v4(20.218,7.366)
  Bottom Layer w0.508: P7.2@20.218,6.257 P7.2
  Bottom Layer w0.635: F1.1@12.797,7.325 12.762,7.29 cw(c12.762,7.351) F1.1 12.7,7.366 v4(15.425,7.366) ; P7.11 15.425,6.96 ; P7.2@20.218,6.257 v4@20.218,7.29
VDD: B1.1 C2.2 C3.2 C6.2 C7.1 C13.1 C14.2 C15.2 C16.2 C17.2 D1.2 L1.1 P1.2 P3.2 P4.2 P5.2 P6.2 R1.2 R2.2 U1.1 U2.5 U4.1 U4.24 U4.36 U4.48 U5.3 U5.7 U5.8 U6.4 | length 155.5
  Top Layer w0.127: v1(10.824,15.15) 10.824,14.601 ccw(c11.55,14.601) 11.55,13.875 cw(c11.55,13.25) 12.175,13.25 12.175,12.715 cw(c11.51,12.715) U2.5
  Top Layer w0.254: v1(14.303,32.551) 14.303,31.315 ; U4.1 cw(c14.405,30.792) 14.303,30.792 14.303,31.315 ; U4.48 14.303,31.315 ; U4.24 20.53,23.324 ccw(c21.025,23.324) v1(20.675,22.973) 20.815,22.834 ccw(c22.611,24.63) 22.611,22.09 U5.3 ; U4.36 v1@22.826,30.69 ; U5.8 U5.7 29.646,23.36 ccw(c29.646,23.635) v1(29.921,23.635)
  Top Layer w0.5: C13.1 7.957,28.399 ccw(c7.957,29.343) v1(8.625,28.675)
  Top Layer w0.508: P5.2 cw(c5.025,41.91) 5.025,43.125 16.51,43.125 ; P1.2 16.51,43.125 ; D1.2 26.098,41.886 ccw(c26.075,41.886) v4(26.075,41.91) ccw(c24.86,41.91) 24.86,43.125 16.51,43.125
  Bottom Layer w0.305: U1.1 C2.2@15.6,20.833
  Bottom Layer w0.5: 8.027,28.7 8.565,28.7 cw(c8.565,28.615) v1(8.625,28.675) ; v1@8.65,28.623 9.942,27.331 9.942,27.293 10.137,27.099 L1.1
  Bottom Layer w0.508: P3.2 P5.2 ; R1.2 8.027,21.8 ; v1(10.824,15.15) 10.974,15.15 ccw(c10.974,16.4) R2.2 12.224,21.743 ccw(c12.143,21.743) 12.2,21.8 ; C14.2 10.85,32.551 ; C2.2@15.534,20.939 C2.2@15.6,20.833 ; C2.2 14.335,22.357 ; P1.2 16.51,41.58 cw(c13.97,41.58) 13.97,39.04 13.39,39.04 ccw(c13.39,36.5) 10.85,36.5 10.85,32.551 ; v1(20.675,22.973) ccw(c19.468,22.973) 19.468,24.181 17.207,24.181 ccw(c17.207,21.705) 15.456,23.456 14.544,22.544 cw(c12.748,24.34) 14.335,22.357 ; v1(22.826,30.7) C15.2 cw(c25.151,32.025) 25.151,34.35 29.921,34.35 ; B1.1 25.959,14.757 ccw(c25.959,16.942) 28.143,16.942 28.143,21.857 cw(c29.921,21.857) v1(29.921,23.635) 29.921,34.35 ; v4(26.075,41.91) 29.95,41.91 ; P4.2 P6.2 29.95,41.91 ; 8.027,21.8 12.2,21.8 ; 8.027,21.8 8.027,28.7 8.027,30.011 cw(c10.567,30.011) 10.567,32.551 10.85,32.551 ; 12.2,21.8 12.748,21.8 ccw(c12.748,24.34) 14.335,22.357 ; 29.921,34.35 29.921,41.881 cw(c29.95,41.881) 29.95,41.91
pads on no net: P7.3 P7.4 P7.9 P7.10 P7.13 P7.14 P7.15 P7.16 U1.2 U1.3 U2.3 U2.4 U3.2 U3.3 U4.6 U6.1 U8.4 U8.5 U8.6 U8.11
copper on no net:
  other v2: 17.23,11.778 18.33,11.778 17.23,12.878 18.33,12.878

## Polygon pours and split planes (outlines as drawn)
GND on Top Layer "GND_L01_P000" (solid, remove dead copper, pour order 0): 0,45.72 0,0 35.56,0 35.56,45.72
GND on Bottom Layer "Bottom Layer-GND" (solid, remove dead copper, pour order 2): 0,45.72 0,0 35.56,0 35.56,45.72

## Keep-outs
Keep-Out Layer:
  lines w0.127: 6.8,9.625 13.3,9.625 13.3,14.625 ; 6.8,9.625 6.8,9.625 ; 6.8,9.625 6.8,14.6 6.825,14.625 8.375,14.625 8.375,14.125 7.5,14.125 7.5,10.125 12.625,10.125 12.625,14.125 11.75,14.125 11.75,14.625 13.3,14.625 ; 13.3,14.625 13.3,14.625
  lines w0.254: 0,1.27 ccw(c1.27,1.27) 1.27,0 34.29,0 ccw(c34.29,1.27) 35.56,1.27 35.56,44.45 ccw(c34.29,44.45) 34.29,45.72 1.27,45.72 ccw(c1.27,44.45) 0,44.45 0,1.27

## Silkscreen, mask and mechanical layers (free items; w line width, h text height)
Top Overlay:
  text "GND" at 0.3,42.811 h1.42
  text "GND" at 2.921,42.811 h1.42
  text "GND" at 13,42.811 h1.42
  text "GND" at 30.61,42.811 h1.42
  text "GND" at 33.325,42.811 h1.42
  text "VDD" at 15.6,42.8 h1.42
  text "TX" at 18.4,42.8 h1.42
  text "RX" at 21,42.8 h1.42
  text "GND" at 13,40.346 h1.42
  text "SCL" at 18.3,40.346 h1.42
  text "SDA" at 20.7,40.346 h1.42
  text "VDD" at 0.3,40.335 h1.42
  text "VDD" at 2.921,40.335 h1.42
  text "VDD" at 15.6,40.335 h1.42
  text "VDD" at 30.61,40.335 h1.42
  text "VDD" at 33.325,40.335 h1.42
  text "BOOT" at 0.3,37.806 h1.42
  text "PA15" at 2.921,37.806 h1.42
  text "TCK" at 33.325,37.804 h1.42
  text "PA12" at 30.61,37.795 h1.42
  text "GND" at 0.3,35.211 h1.42
  text "PB3" at 2.921,35.211 h1.42
  text "PA11" at 30.61,35.2 h1.42
  text "GND" at 33.325,35.211 h1.42
  text "GND" at 0.3,32.611 h1.42
  text "PB4" at 2.921,32.6 h1.42
  text "PA10" at 30.61,32.611 h1.42
  text "TMS" at 33.325,32.611 h1.42
  text "GND" at 0.3,30.211 h1.42
  text "PB5" at 2.921,30.186 h1.42
  text "PA9" at 30.61,30.126 h1.42
  text "RST" at 33.325,30.111 h1.42
  text "PB6" at 2.921,27.646 h1.42
  text "GND" at 0.3,27.611 h1.42
  text "PA8" at 30.61,27.52 h1.42
  text "GND" at 33.325,27.511 h1.42
  text "GND" at 0.3,25.111 h1.42
  text "GND" at 33.325,25.111 h1.42
  text "PB7" at 2.921,25.07 h1.42
  text "PB15" at 30.61,25.057 h1.42
  text "GND" at 0.3,22.511 h1.42
  text "PB8" at 2.921,22.511 h1.42
  text "PB14" at 30.61,22.5 h1.42
  text "GND" at 33.325,22.511 h1.42
  text "GND" at 0.3,19.911 h1.42
  text "PB9" at 2.921,19.9 h1.42
  text "PB13" at 30.61,19.911 h1.42
  text "GND" at 33.325,19.911 h1.42
  text "GND" at 0.3,17.336 h1.42
  text "PA0" at 2.921,17.336 h1.42
  text "PB10" at 30.61,17.336 h1.42
  text "GND" at 33.325,17.336 h1.42
  text "GND" at 0.3,14.861 h1.42
  text "PA1" at 2.921,14.85 h1.42
  text "PB2" at 30.61,14.85 h1.42
  text "GND" at 33.325,14.861 h1.42
  text "GND" at 0.3,12.311 h1.42
  text "PA2" at 2.921,12.3 h1.42
  text "PB1" at 30.61,12.3 h1.42
  text "GND" at 33.325,12.311 h1.42
  text "GND" at 0.3,9.761 h1.42
  text "PA3" at 2.921,9.761 h1.42
  text "PB0" at 30.61,9.761 h1.42
  text "GND" at 33.2,9.761 h1.42
  text "Tiny Bord" at 5.15,7.684 h2.79
  text "PA5" at 0.3,7.336 h1.42
  text "PA4" at 2.921,7.325 h1.42
  text "PA7" at 30.61,7.325 h1.42
  text "PA6" at 33.2,7.336 h1.42

## Text inside footprints (layer, text, board x,y; h text height)
B1: Top Overlay "+" at 25.471,13.857 h1.42 r270